# Altium PCB PCB1.pcbdoc
Units mm, origin at the board's own origin, x right, y up, seen from the top; angles counter-clockwise.
Board outline 71.25 x 78.87 mm, 2 copper layers (Top Layer, Bottom Layer); 65 components, 40 nets, 154 pads, 4 vias.
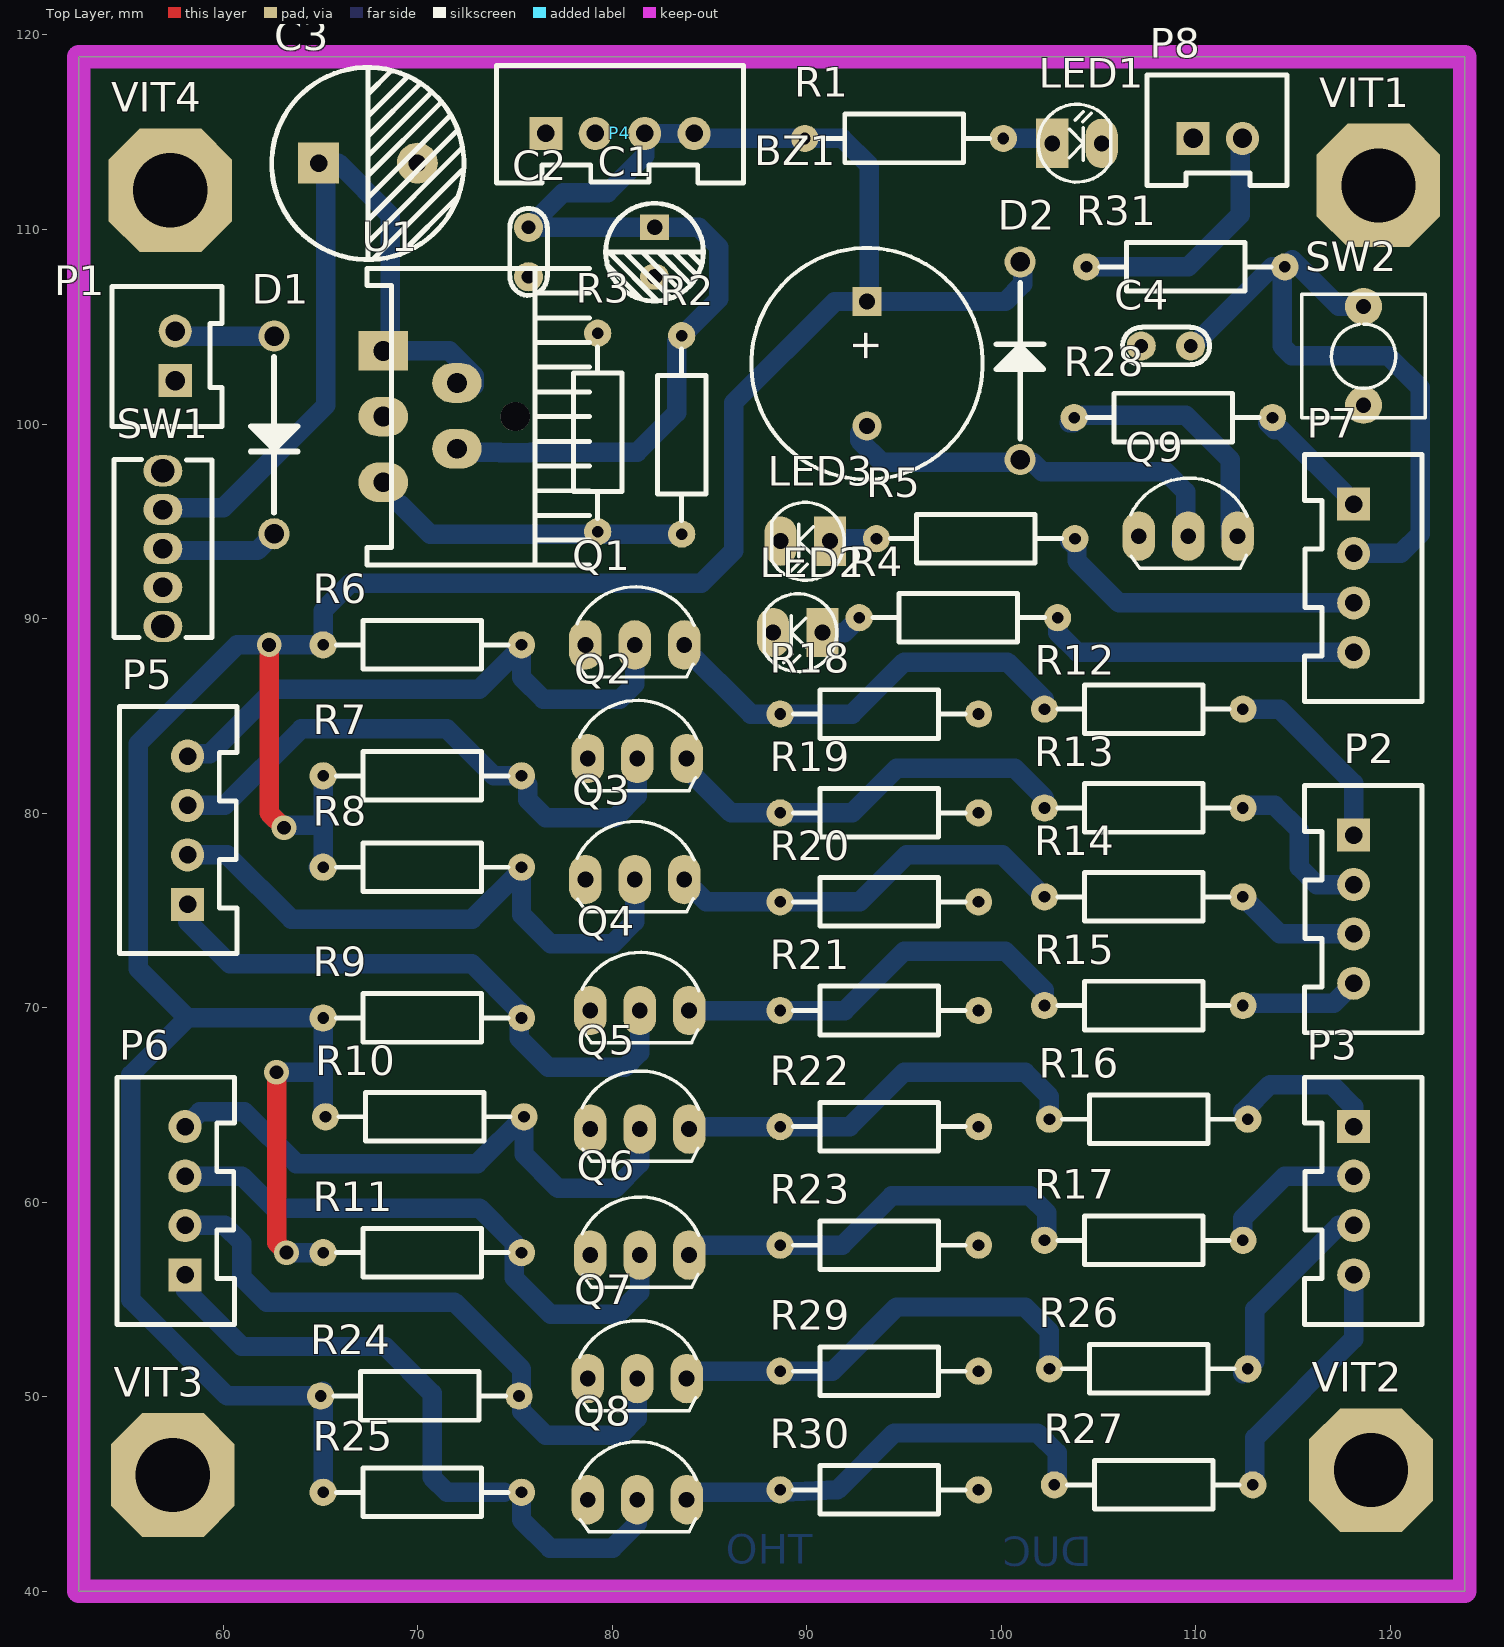
[diagram p0: Top Layer view]
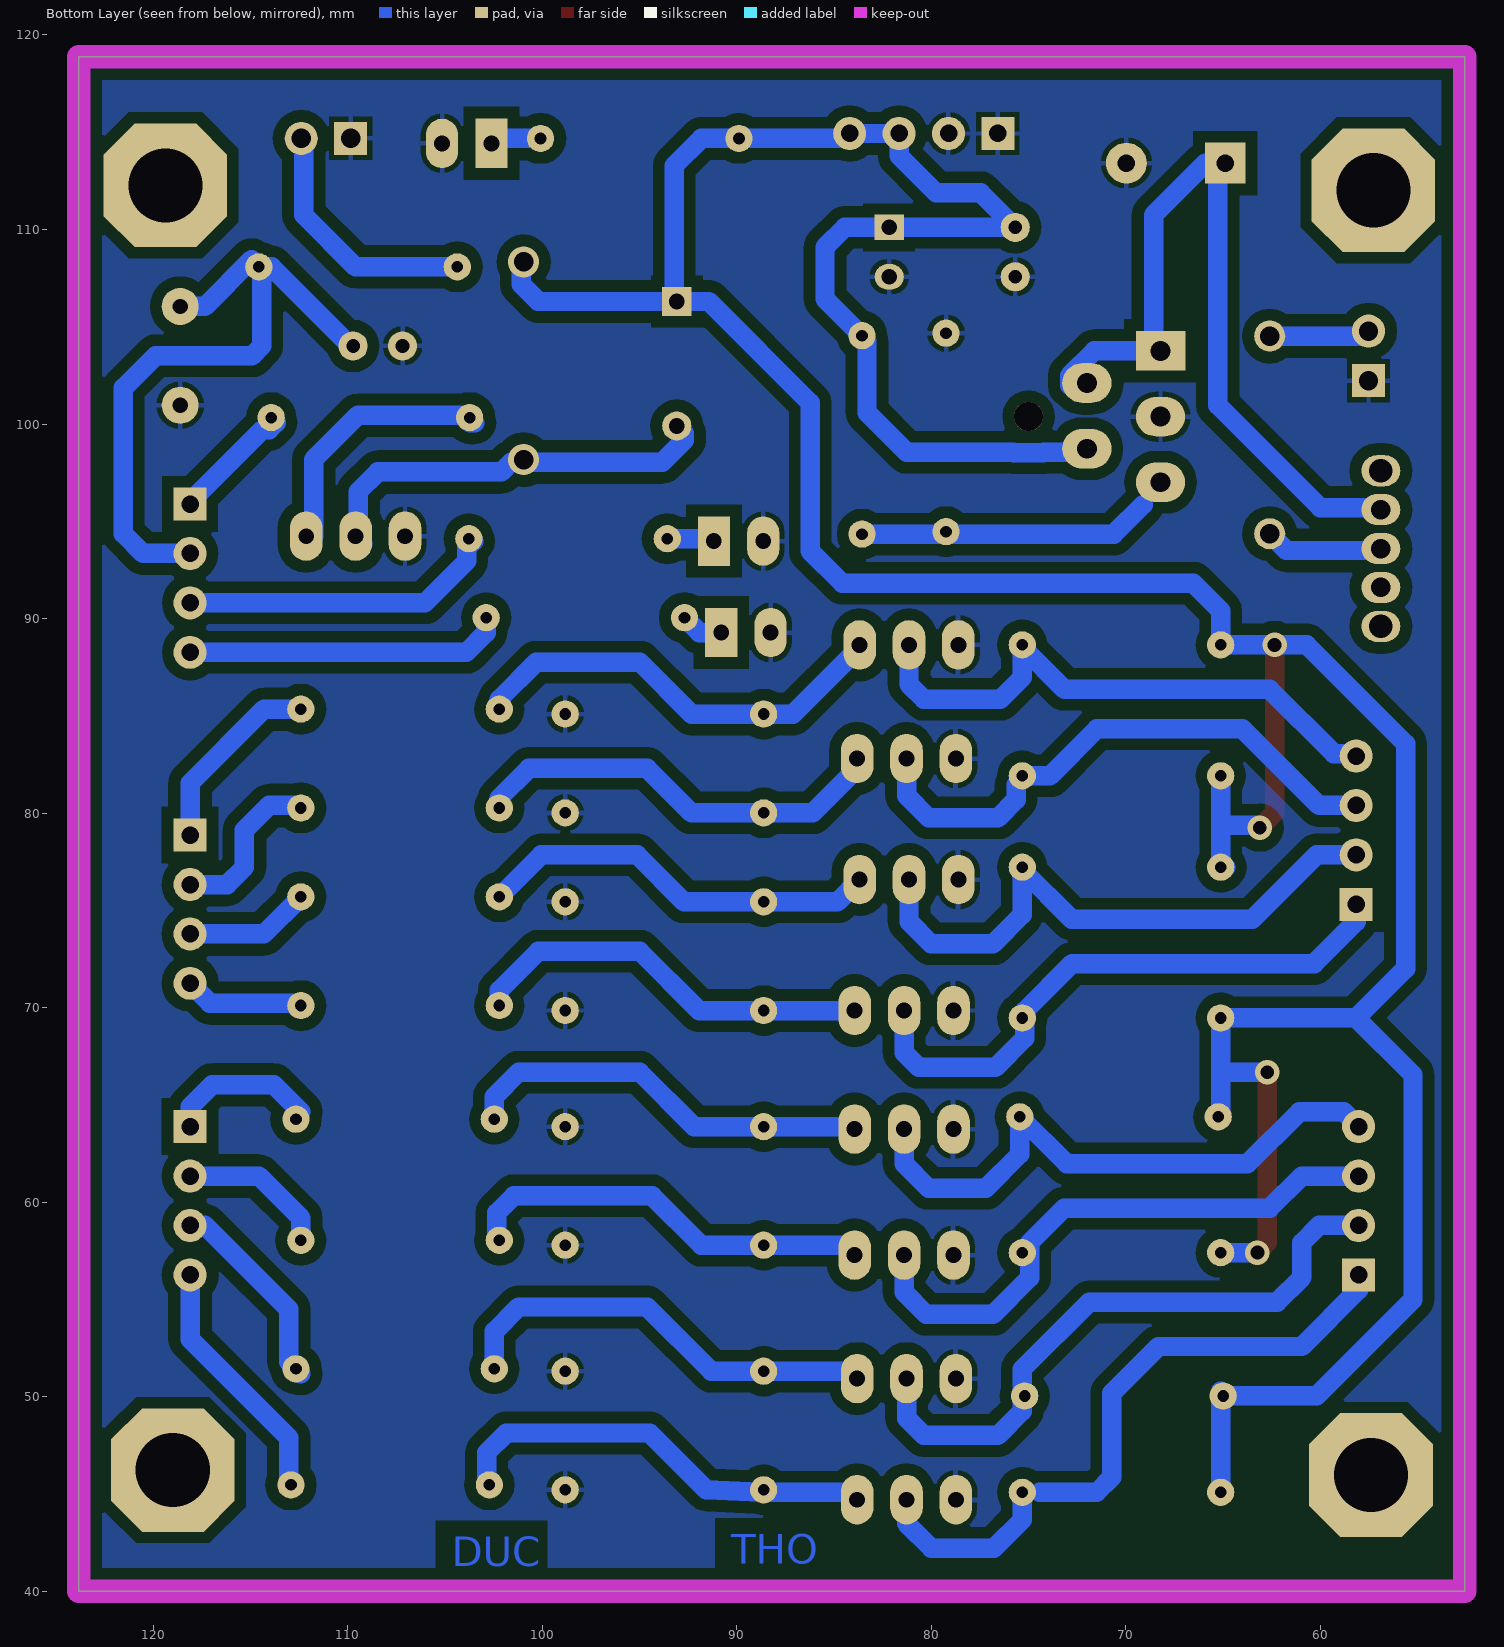
[diagram p1: Bottom Layer view, seen from below]
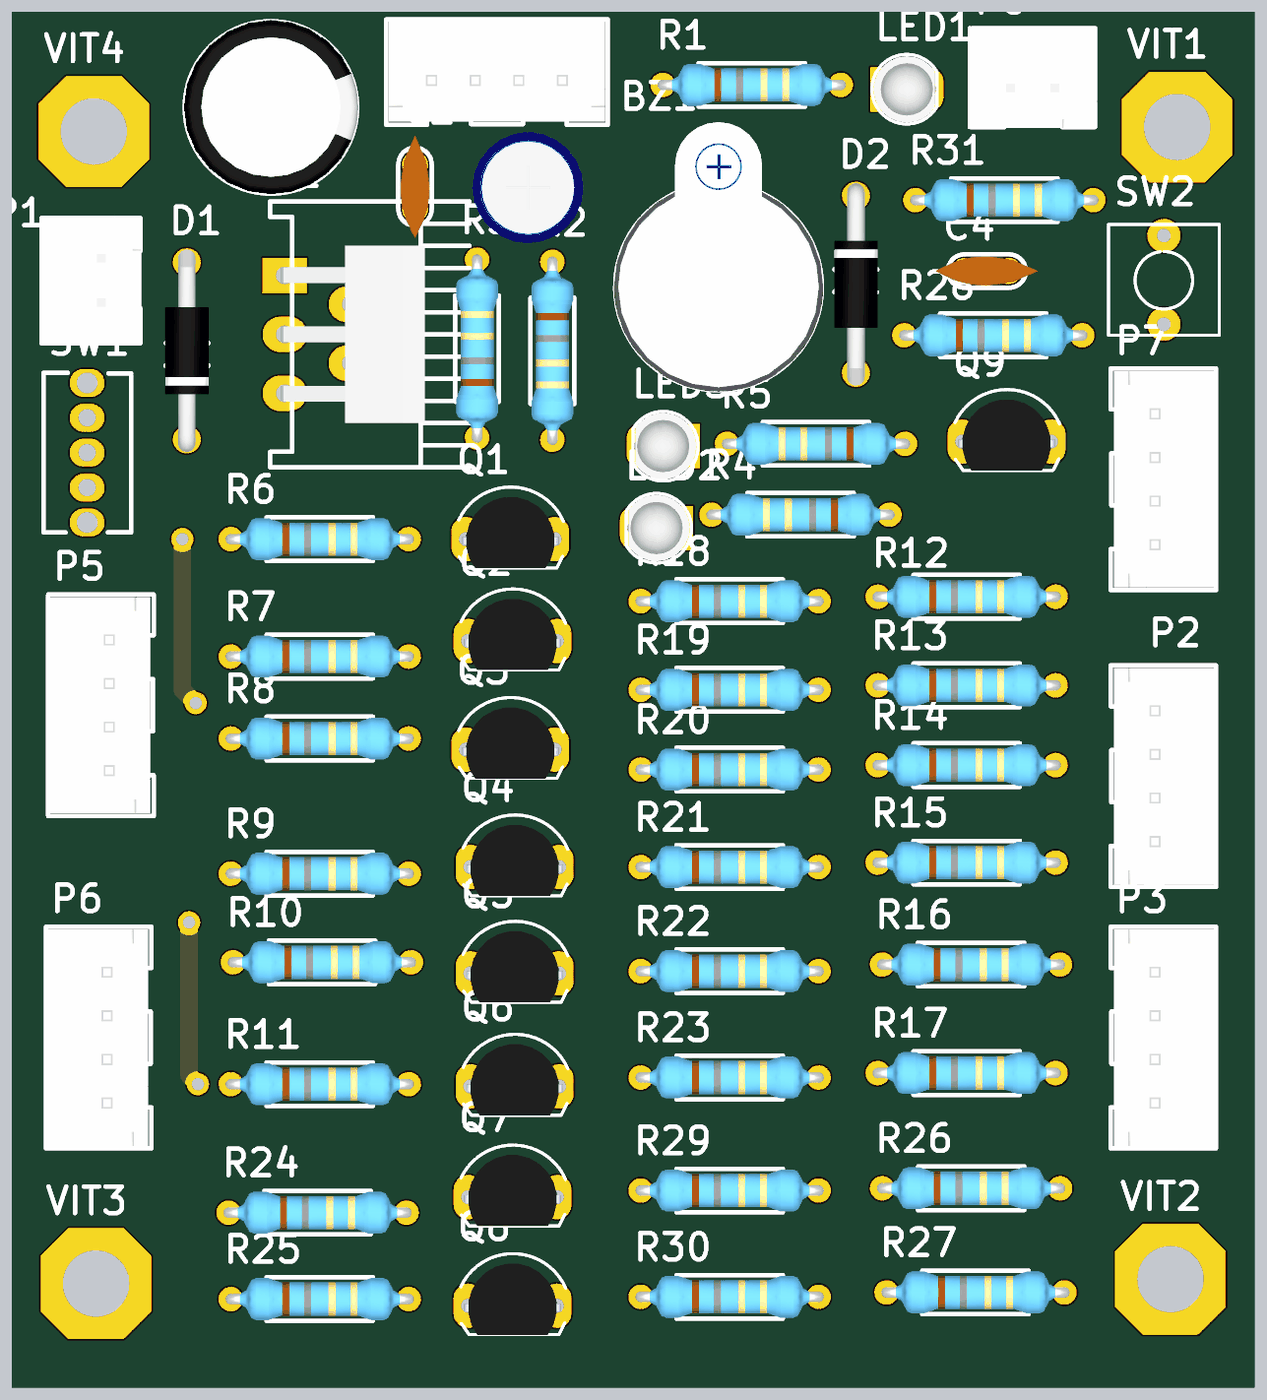
[diagram p2: 3D render of the assembled board from above, using the file's embedded part models]

## Layer stack, top to bottom
Top Solder: solder mask 0.0102, Solder Resist, Dk 3.5
Top Layer: signal copper 0.0356
Dielectric 1: dielectric 0.32, FR-4, Dk 4.8
Bottom Layer: signal copper 0.0356
Bottom Solder: solder mask 0.0102, Solder Resist, Dk 3.5

## Board outline
52.578,40.005 52.578,118.872 123.825,118.872 123.825,40.005

## Design rules (kind name [scope] priority, off if disabled: settings)
Clearance [All] p1: gap=0.6 ignorepadtopadclearanceinfootprint=FALSE
PolygonConnect [All] p1: connectstyle=Relief reliefconductorwidth=0.254 reliefentries=4 polygonreliefangle="90 Angle" airgapwidth=0.254
RoutingVias [All] p1: holewidth=0.711 width=1.27 viastyle="Through Hole" minholewidth=0.711 minwidth=1.27 maxholewidth=0.711 maxwidth=1.27
SolderMaskExpansion [All] p1: expansion=0.102
Width [All] p1: maxlimit=3 minlimit=1 preferedwidth=2
30 further rules are at their usual default settings.

## Components (designator, comment, footprint, x,y, rotation, side; value= is the part's Value field where it differs from the comment)
BZ1 "2Khz" "coi xung" 93.091,103.099 r270 top
C1 "100uF-25V" "tu hoa 5mm" 82.169,108.839 r270 top
C2 "15pF" "tu gom" 75.692,108.839 r270 top
C3 "1000uF-10V" "tu hoa 10mm" 67.437,113.411 r0 top
C4 "15pF" "tu gom" 108.458,104.013 r180 top
D1 "1N4007" 1N4007 62.611,99.441 r270 top
D2 "1N4007" 1N4007 100.965,103.251 r90 top
LED1 "LED" LED-3 102.616,114.427 r0 top value="LED 3 ly Single Colour"
LED2 "LED" LED-3 90.805,89.281 r180 top value="LED 3 ly Single Colour"
LED3 "LED" LED-3 91.186,93.98 r180 top value="LED 3 ly Single Colour"
P1 "2.54-2p" "Header Duc Thang 2P 2.54" 57.531,102.235 r180 top
P2 "2.54-4p" "Header Duc Thang 4p 2.54" 118.11,75.057 r90 top
P3 "2.54-4p" "Header Duc Thang 4p 2.54" 118.11,60.071 r90 top
P4 "2.54-4p" "Header Duc Thang 4p 2.54" 80.391,114.935 r180 top
P5 "2.54-4p" "Header Duc Thang 4p 2.54" 58.166,79.121 r270 top
P6 "2.54-4p" "Header Duc Thang 4p 2.54" 58.039,60.071 r270 top
P7 "2.54-4p" "Header Duc Thang 4p 2.54" 118.11,92.075 r90 top
P8 "2.54-2p" "Header Duc Thang 2P 2.54" 109.855,114.681 r90 top
Q1 "C1815" QTO-92 81.153,88.646 r0 top
Q2 "C1815" QTO-92 81.28,82.804 r0 top
Q3 "C1815" QTO-92 81.153,76.581 r0 top
Q4 "C1815" QTO-92 81.407,69.85 r0 top
Q5 "C1815" QTO-92 81.407,63.754 r0 top
Q6 "C1815" QTO-92 81.407,57.277 r0 top
Q7 "C1815" QTO-92 81.28,50.927 r0 top
Q8 "C1815" QTO-92 81.28,44.704 r0 top
Q9 "C1815" QTO-92 109.601,94.234 r0 top
R1 "1.5k" "tro vach 1/4w" 94.996,114.681 r180 top
R2 "4k7" "tro vach 1/4w" 83.566,99.441 r90 top
R3 "1k5" "tro vach 1/4w" 79.248,99.568 r270 top
R4 "1.5k" "tro vach 1/4w" 97.79,90.043 r0 top
R5 "1.5k" "tro vach 1/4w" 98.679,94.107 r0 top
R6 "4k7" "tro vach 1/4w" 70.231,88.646 r180 top
R7 "4k7" "tro vach 1/4w" 70.231,81.915 r180 top
R8 "4k7" "tro vach 1/4w" 70.231,77.216 r180 top
R9 "4k7" "tro vach 1/4w" 70.231,69.469 r180 top
R10 "4k7" "tro vach 1/4w" 70.358,64.389 r180 top
R11 "4k7" "tro vach 1/4w" 70.231,57.404 r180 top
R12 "1k" "tro vach 1/4w" 107.315,85.344 r180 top
R13 "1k" "tro vach 1/4w" 107.315,80.264 r180 top
R14 "1k" "tro vach 1/4w" 107.315,75.692 r180 top
R15 "1k" "tro vach 1/4w" 107.315,70.104 r180 top
R16 "1k" "tro vach 1/4w" 107.569,64.262 r180 top
R17 "1k" "tro vach 1/4w" 107.315,58.039 r180 top
R18 "10k" "tro vach 1/4w" 93.726,85.09 r180 top
R19 "10k" "tro vach 1/4w" 93.726,80.01 r180 top
R20 "10k" "tro vach 1/4w" 93.726,75.438 r180 top
R21 "10k" "tro vach 1/4w" 93.726,69.85 r180 top
R22 "10k" "tro vach 1/4w" 93.726,63.881 r180 top
R23 "10k" "tro vach 1/4w" 93.726,57.785 r180 top
R24 "4k7" "tro vach 1/4w" 70.104,50.038 r180 top
R25 "4k7" "tro vach 1/4w" 70.231,45.085 r180 top
R26 "1k" "tro vach 1/4w" 107.569,51.435 r180 top
R27 "1k" "tro vach 1/4w" 107.823,45.466 r180 top
R28 "1k" "tro vach 1/4w" 108.839,100.33 r180 top
R29 "10k" "tro vach 1/4w" 93.726,51.308 r180 top
R30 "10k" "tro vach 1/4w" 93.726,45.212 r180 top
R31 "10k" "tro vach 1/4w" 109.474,108.077 r180 top
SW1 "Dip SW" SW3P 56.945,97.601 r0 top
SW2 "SW" SW2 118.618,100.965 r90 top value="SW chip 2 pin"
U1 "LM2576T-5.0" LM2576t 72.466,100.406 r270 top
VIT1 "1" VIT 119.38,112.268 r0 top
VIT2 "1" VIT 118.999,46.228 r0 top
VIT3 "1" VIT 57.404,45.974 r0 top
VIT4 "1" VIT 57.277,112.014 r0 top

## Footprints (in the part's own frame and the unit in brackets; to place one, negate y for a bottom-side part, rotate by r counter-clockwise, add the part's x,y. Pads: shape width x height; smd on the part's side, far side on the other; paste and mask are expansions set on the pad)
1N4007 [mm] "DIODE_DIP"
  round 1.6 hole 1 mask+0.1: 1(-5.08,0) 2(5.08,0)
  silkscreen extent -4,-1.2 4,1.21, body extent -5.8,-1.25 5.8,1.25, height 2.75
"coi xung" [mm]
  rect 1.5x1.5 hole 0.8: 1(-3.2,0)
  round 1.5 hole 0.8: 2(3.2,0)
  silkscreen extent -5.95,-5.95 5.95,5.95, body extent -9.45,-6 6,6, height 3.99
"Header Duc Thang 2P 2.54" [mm]
  rect 1.7x1.7 hole 1: 1(0,0)
  round 1.7 hole 1: 2(0,-2.54)
  silkscreen extent -2.41,-4.83 3.25,2.36, body extent -2.47,-4.94 3.33,2.46, height 7
"Header Duc Thang 4p 2.54" [mm]
  rect 1.7x1.7 hole 0.9: 1(3.81,0)
  round 1.7 hole 0.9: 2(1.27,0) 3(-1.27,0) 4(-3.81,0)
  silkscreen extent -6.35,-3.5 6.35,2.54, body extent -6.2,-3.4 6.2,2.35, height 7
LED-3 [mil] "LED 2 PIN, 3ly Only colour"
  rect 65x100 hole 32: 1(0,0)
  oval 65x100 hole 32: 2(100,0)
  silkscreen extent -29,-78 118,79, body extent -25,-75 113,75, height 217
LM2576t [mil]
  rect 80x100 hole 40: 1(-132,-167.09)
  oval 80x100 hole 40: 2(-67,-18) 3(1,-167) 4(66,-18) 5(134,-167)
  round 59.06 hole 59.06: ""(1,100)
  silkscreen extent -299,-200 301,250, body extent -199,-175 201,150, height 859
QTO-92 [mil] "TO-92"
  oval 66x100 hole 32: 1(-100,0) 2(0,0) 3(100,0)
  silkscreen extent -117,-65 120,118, body extent -109,-66 109,95, height 245
SW2 [mil] "SW button 2pin, 250x 250 mil"
  round 75 hole 31: 1(0,0) 2(200,0)
  silkscreen extent -25,-125 225,125
SW3P [mm]
  oval 2x1.6 hole 1: 1(-0.049,-4.002) 2(-0.049,-2.002) 3(-0.049,-6.002)
  oval 2x1.6 hole 1.2: 4(-0.049,-0.002) 5(-0.049,-8.002)
  silkscreen extent -2.56,-8.57 2.47,0.58, body extent -2.54,-8.51 2.41,0.64, height 8.9
"tro vach 1/4w" [mm]
  round 1.4 hole 0.6: 1(-5.1,0) 2(5.1,0)
  silkscreen extent -4.39,-1.25 4.42,1.25, body extent -5.38,-1.2 5.38,1.2, height 2.41
"tu gom" [mm] "Tu gom mini"
  round 1.5 hole 0.7: 1(-1.27,0) 2(1.27,0)
  silkscreen extent -2.25,-0.97 2.22,0.97, body extent -2.92,-0.85 2.92,0.85, height 6.12
"tu hoa 5mm" [mm]
  rect 1.3x1.5 hole 0.8: 1(-1.27,0)
  oval 1.3x1.5 hole 0.8: 2(1.27,0)
  silkscreen extent -2.51,-2.51 2.51,2.51, body extent -3.12,-3.18 3.23,3.18, height 11.53
"tu hoa 10mm" [mm]
  rect 2.1x2.1 hole 0.9: 1(-2.54,0)
  round 2.1 hole 0.9: 2(2.54,0)
  silkscreen extent -4.95,-4.96 4.93,4.92, body extent -5,-5 4.97,5, height 20.01
VIT [mm] "VIT"
  oct 6.35x6.35 hole 3.81: VIT1(0,0)

## Part data
BZ1: library part "Coi xung 2Khz", "C?m", Chung_Loai=C?m, Don_Vi=Con, Ma_Hang=MH007704, Ten_Linh_Kien="Còi Xung 8.5x12MM 16R 2Khz 3-12V"
C1: library part "Tu Hoa 100uF 25V 6x11", "C?m", Chung_Loai=C?m, Don_Vi=Con, Ma_Hang=MH001351, So_Chan=2, Ten_Linh_Kien="T? Hóa 100uF 25V 6x11MM"
C2 C4: library part "Tu gom 15pF 50V", "C?m", Chung_Loai=C?m, Don_Vi=Con, Ma_Hang=MH004767, So_Chan=2, Ten_Linh_Kien="T? g?m 15P 50V"
C3: library part "Tu Hoa 1000uF 10V 10x12", "C?m", Chung_Loai=C?m, Don_Vi=Con, Ma_Hang=MH006614, So_Chan=2, Ten_Linh_Kien="T? Hóa 1000uF 10V 10x12MM"
D1 D2: "Diode LS 1A 1000V DO-41", ComponentLink1Description=Datasheet, ComponentLink1URL="D:\Dropbox\Datasheets\Diodes and Rectifiers\Diodes\1N400X.pdf", Unit Price=0.0072
LED1 LED2 LED3: "LED Single colour Green and Red"
P1 P8: library part "Header 2.54-2p Duc Thang", "C?m", Chung_Loai=C?m, Don_Vi=Con, Ma_Hang=MH001283, So_Chan=2, Ten_Linh_Kien="Header 2P XH2.54-2P Ð?c Th?ng"
P2 P3 P4 P5 P6 P7: library part "Header 2.54_4p Duc Thang", "C?m", Chung_Loai=C?m, Don_Vi=Con, Ma_Hang=MH001285, So_Chan=4, Ten_Linh_Kien="Header 4P XH2.54-4P Ð?c Th?ng"
Q1 Q2 Q3 Q4 Q5 Q6 Q7 Q8 Q9: "NPN 600mW, ECB", =C2383
R1 R2 R3 R4 R5 R6 R7 R8 R9 R10 R11 R12 R13 R14 R15 R16 R17 R18 R19 R20 R21 R22 R23 R24 R25 R26 R27 R28 R29 R30 R31: library part "Tro Vach 1/4W 5% 1.5k", "C?m", Chung_Loai=C?m, Don_Vi=Con, Ma_Hang=MH007284, So_Chan=2, Ten_Linh_Kien="Tr? V?ch 1/4w 5% 1.5k"
SW1: library part Switch3P, "Dip Switch 3 pin"
SW2: library part SW2, "Switch button 2 pin"
U1: "SIMPLE SWITCHER; 3A Step-Down Voltage Regulator", DigiKeyPartNumber=LM2576T-5.0-ND, Manufacturer="National Semiconductor", PackageTopMarking="NSUZXYTT*LM2576T*-5.0 P+", PowerWise=N, Code_JEDEC=TO-220-AB, ComponentLink1Description="LM2576 Datasheet", ComponentLink1URL=http://www.national.com/ds/LM/LM2576.pdf, ComponentLink2Description="LM2576 Web Page", ComponentLink2URL=http://www.national.com/pf/LM/LM2576.html, ComponentLink3Description="T05A Package Page", ComponentLink3URL=http://www.national.com/packaging/folders/t05a.html, CompType=Switcher, DatasheetVersion=Aug-2004, FirstPublished=4-Dec-2008, PackageDescription="TO-220, Molded, 5 Lead, Straight", PackageReference=T05A, PackageVersion="revJ, Jan-1992", PartNumber=LM2576T-5.0, PinCount=5, Publisher="Altium Limited", RoHS=O
VIT1 VIT2 VIT3 VIT4: library part VIT, "Oc Vit"

## Via types
v1: diameter 1.27, hole 0.711, Top Layer to Bottom Layer, 4 vias

## Nets (pads, with @x,y where several pads share a name; then routed paths per layer and width w, separated by ;. In a path a pad name is that pad's centre, name@x,y a point inside that pad or via, vN(x,y) a via of type N, cw(c..) or ccw(c..) an arc to the next point about the centre after c; other vN are vias at no path point)
3V3: P8.2 R31.2 | length 13.1
  Bottom Layer w1: R31.2@104.247,108.077 104.628,108.077 109.601,108.077 112.268,110.744 112.268,114.554 P8.2
+5: BZ1.1 C1.1 C2.1 D2.2 P4.3 P4.4 R1.2 R2.2 R6.2 R7.2 R8.2 R9.2 R10.2 R11.2 R24.2 R25.2 U1.4 | length 211
  Top Layer w1: v1(62.357,88.646) 62.357,80.01 v1(63.119,79.248) ; v1(62.738,66.675) 62.738,57.912 v1(63.246,57.404)
  Bottom Layer w1: v1(62.738,66.675) 65.131,66.675 ; v1(63.119,79.248) 63.246,79.375 65.131,79.375 ; v1(63.246,57.404) R11.2 ; R8.2@64.877,77.216 65.131,77.47 65.131,79.375 ; R24.2 60.198,50.038 55.245,54.991 55.245,66.548 58.166,69.469 ; R25.2 R24.2@65.131,50.292 ; R7.2 65.131,79.375 ; R10.2 65.131,64.516 65.131,66.675 ; U1.4@72.898,98.552 74.219,98.552 74.24,98.531 75.772,98.531 75.794,98.552 81.28,98.552 83.312,100.584 83.312,104.267 85.471,106.426 85.471,109.093 84.455,110.109 C1.1 C2.1 77.47,111.887 79.756,111.887 81.661,113.792 P4.3 P4.4 84.455,114.681 R1.2 91.821,114.681 93.218,113.284 93.218,106.426 BZ1.1 ; D2.2 101.092,108.204 101.092,107.188 100.203,106.299 BZ1.1 ; 58.166,69.469 R9.2 65.131,66.675 ; 58.166,69.469 55.626,72.009 55.626,83.566 60.706,88.646 v1(62.357,88.646) R6.2 65.131,90.404 66.548,91.821 84.582,91.821 86.233,93.472 86.233,101.092 91.44,106.299 BZ1.1
BTN1: C4.1 P7.2 R31.1 SW2.2 | length 34.7
  Bottom Layer w1: C4.1@109.728,103.886 113.919,108.077 R31.1 114.945,108.448 117.348,106.045 SW2.2 ; R31.1@114.427,107.569 114.427,104.013 114.935,103.505 119.888,103.505 121.539,101.854 121.539,94.361 120.523,93.345 P7.2
CHAN1: P2.1 R12.1 | length 9.4
  Bottom Layer w1: R12.1@112.923,85.344 114.3,85.344 118.11,81.534 P2.1
CHAN2: P2.2 R13.1 | length 8.1
  Bottom Layer w1: R13.1@112.796,80.391 114.046,80.391 115.316,79.121 115.316,77.216 116.205,76.327 P2.2
CHAN3: P2.3 R14.1 | length 6.5
  Bottom Layer w1: R14.1 114.32,73.787 P2.3
CHAN4: P2.4 R15.1 | length 6.1
  Bottom Layer w1: R15.1@112.415,70.231 117.094,70.231 P2.4
CHAN5: P3.1 R16.1 | length 7.8
  Bottom Layer w1: R16.1@112.415,64.643 113.812,66.04 116.967,66.04 118.11,64.897 P3.1
CHAN6: P3.2 R17.1 | length 7.7
  Bottom Layer w1: R17.1 112.415,59.182 114.574,61.341 P3.2
CHAN7: P3.3 R26.1 | length 10.4
  Bottom Layer w1: R26.1@112.415,51.181 R26.1 113.03,51.796 113.03,54.483 117.348,58.801 P3.3
CHAN8: P3.4 R27.1 | length 12.7
  Bottom Layer w1: R27.1@113.03,45.7 113.03,47.879 118.11,52.959 P3.4
COI: P7.1 R28.1 | length 5.9
  Bottom Layer w1: R28.1@113.685,100.076 114.046,99.715 114.382,99.715 P7.1@117.983,96.114
GND: C1.2 C2.2 C3.2 C4.2 LED1.2 LED2.2 LED3.2 P1.1 P4.1 P4.2 P8.1 Q1.1 Q2.1 Q3.1 Q4.1 Q5.1 Q6.1 Q7.1 Q8.1 Q9.1 R3.1 R18.1 R19.1 R20.1 R21.1 R22.1 R23.1 R29.1 R30.1 SW2.1 U1.3
LED1: P7.4 R4.2 | length 16.4
  Bottom Layer w1: R4.2 102.89,89.281 103.906,88.265 P7.4
LED2: P7.3 R5.2 | length 16.3
  Bottom Layer w1: R5.2@103.525,93.98 103.886,93.619 103.886,92.964 106.045,90.805 P7.3
NetBZ1_2: BZ1.2 D2.1 Q9.2 | length 21.5
  Bottom Layer w1: BZ1.2 92.71,99.518 92.71,99.162 93.828,98.044 101.6,98.044 102.108,97.536 108.458,97.536 109.474,96.52 109.474,94.107 Q9.2@109.22,93.853
NetC3_1: C3.1 SW1.2 U1.1 U1.2 | length 40.3
  Bottom Layer w1: SW1.2 56.996,95.699 60.012,95.699 65.278,100.965 65.278,113.03 C3.1 65.913,113.411 68.58,110.744 68.58,103.759 71.628,103.759 72.898,102.489 U1.2@72.898,101.981
NetD1_1: D1.1 P1.2 | length 5.1
  Bottom Layer w1: P1.2@57.531,104.521 D1.1
NetD1_2: D1.2 SW1.1 | length 6.2
  Bottom Layer w1: SW1.1 56.996,93.499 61.749,93.499 D1.2 D1.2@62.579,94.393
NetLED1_1: LED1.1 R1.1 | length 2.6
  Bottom Layer w1: R1.1 102.362,114.681 LED1.1
NetLED2_1: LED2.1 R4.1 | length 2.2
  Bottom Layer w1: LED2.1 91.928,89.281 R4.1
NetLED3_1: LED3.1 R5.1 | length 2.4
  Bottom Layer w1: LED3.1 91.313,94.107 R5.1
NetQ1_3: Q1.3 R12.2 R18.2 | length 22
  Bottom Layer w1: Q1.3 83.693,88.519 87.122,85.09 R18.2 92.329,85.09 94.996,87.757 100.31,87.757 R12.2@102.215,85.852
NetQ2_3: Q2.3 R13.2 R19.2 | length 21.4
  Bottom Layer w1: Q2.3 83.82,82.296 86.106,80.01 R19.2 92.329,80.01 94.615,82.296 100.691,82.296 R13.2@102.215,80.772
NetQ3_3: Q3.3 R14.2 R20.2 | length 20.9
  Bottom Layer w1: Q3.3 84.836,75.438 R20.2 92.71,75.438 95.123,77.851 100.056,77.851 R14.2
NetQ4_3: Q4.3 R15.2 R21.2 | length 21.4
  Bottom Layer w1: Q4.3@83.947,70.358 84.455,69.85 R21.2 91.948,69.85 94.996,72.898 100.203,72.898 102.215,70.886 R15.2
NetQ5_3: Q5.3 R16.2 R22.2 | length 21.4
  Bottom Layer w1: Q5.3 84.074,63.881 R22.2 92.202,63.881 94.996,66.675 101.219,66.675 102.469,65.425 R16.2
NetQ6_3: Q6.3 R17.2 R23.2 | length 21.2
  Bottom Layer w1: Q6.3 84.455,57.785 R23.2 91.821,57.785 94.361,60.325 101.473,60.325 102.342,59.456 R17.2@102.342,58.293
NetQ7_3: Q7.3 R26.2 R29.2 | length 22.6
  Bottom Layer w1: Q7.3 84.201,51.308 R29.2 91.313,51.308 94.615,54.61 101.219,54.61 102.469,53.36 R26.2
NetQ8_3: Q8.3 R27.2 R30.2 | length 22.3
  Bottom Layer w1: Q8.3@83.947,45.085 88.753,45.085 91.567,45.212 94.488,48.133 101.854,48.133 102.87,47.117 102.87,45.613 R27.2
NetQ9_3: Q9.3 R28.2 | length 13.3
  Bottom Layer w1: R28.2@103.485,100.076 103.719,100.076 104.1,100.457 109.474,100.457 111.76,98.171 Q9.3@111.76,94.234
NetR2_1: R2.1 R3.2 U1.5 | length 15.3
  Bottom Layer w1: 69.113,95.86 70.632,94.341 R3.2@79.375,94.341 ; R3.2 R3.2@79.375,94.341 ; R2.1 R3.2@79.375,94.341
SERVO1: P5.4 Q1.2 R6.1 | length 29.7
  Bottom Layer w1: P5.4 58.293,83.058 59.309,83.058 62.611,86.36 73.152,86.36 75.331,88.539 75.331,86.975 76.454,85.852 80.391,85.852 81.153,86.614 Q1.2
SERVO2: P5.3 Q2.2 R7.1 | length 29
  Bottom Layer w1: P5.3 60.071,80.391 64.008,84.328 71.501,84.328 73.914,81.915 R7.1 ; R7.1@75.648,81.451 75.648,80.689 76.581,79.756 80.137,79.756 81.28,80.899 Q2.2
SERVO3: P5.2 Q3.2 R8.1 | length 31
  Bottom Layer w1: P5.2 60.198,77.851 63.5,74.549 72.791,74.549 75.331,77.089 75.331,74.783 76.835,73.279 80.01,73.279 81.153,74.422 Q3.2
SERVO4: P5.1 Q4.2 R9.1 | length 30.5
  Bottom Layer w1: P5.1 58.166,74.422 60.325,72.263 72.771,72.263 75.204,69.83 75.204,68.433 76.708,66.929 80.645,66.929 81.407,67.691 Q4.2
SERVO5: P6.4 Q5.2 R10.1 | length 30.7
  Bottom Layer w1: P6.4 58.801,64.643 61.087,64.643 63.754,61.976 73.045,61.976 R10.1 75.458,62.464 77.216,60.706 80.137,60.706 81.407,61.976 Q5.2
SERVO6: P6.3 Q6.2 R11.1 | length 29.7
  Bottom Layer w1: P6.3 60.96,61.341 62.611,59.69 73.172,59.69 74.95,57.912 74.95,56.114 76.835,54.229 80.264,54.229 81.407,55.372 Q6.2
SERVO7: P6.2 Q7.2 R24.1 | length 32.4
  Bottom Layer w1: P6.2 60.071,58.801 60.96,57.912 60.96,56.134 62.23,54.864 71.882,54.864 75.331,51.415 75.331,49.256 76.581,48.006 80.391,48.006 81.28,48.895 Q7.2
SERVO8: P6.1 Q8.2 R25.1 | length 34.2
  Bottom Layer w1: P6.1 58.039,55.499 60.96,52.578 68.326,52.578 70.739,50.165 70.739,45.847 71.501,45.085 74.442,45.085 ; R25.1 75.331,43.668 76.786,42.213 80.01,42.213 81.28,43.483 Q8.2@81.28,45.212
pads on no net: SW1.3 SW1.4 SW1.5 U1. VIT1.VIT1 VIT2.VIT1 VIT3.VIT1 VIT4.VIT1

## Polygon pours and split planes (outlines as drawn)
GND on Bottom Layer "GND_L02_P004" (solid, remove dead copper, pour order 4): 52.93,118.877 123.923,118.877 123.923,40.264 124.177,40.01 52.93,40.01 52.93,118.877

## Keep-outs
Keep-Out Layer:
  the board outline again, w1.2

## Other copper
Bottom Layer:
  text "THO" at 90.297,41.402 h1.52
  text "DUC" at 104.648,41.275 h1.52

## Text inside footprints (layer, text, board x,y; h text height)
BZ1: Top Overlay "+" at 92.38,104.889 h1.52 r270